# EAGLE board u2x (EAGLE 9.6.1)
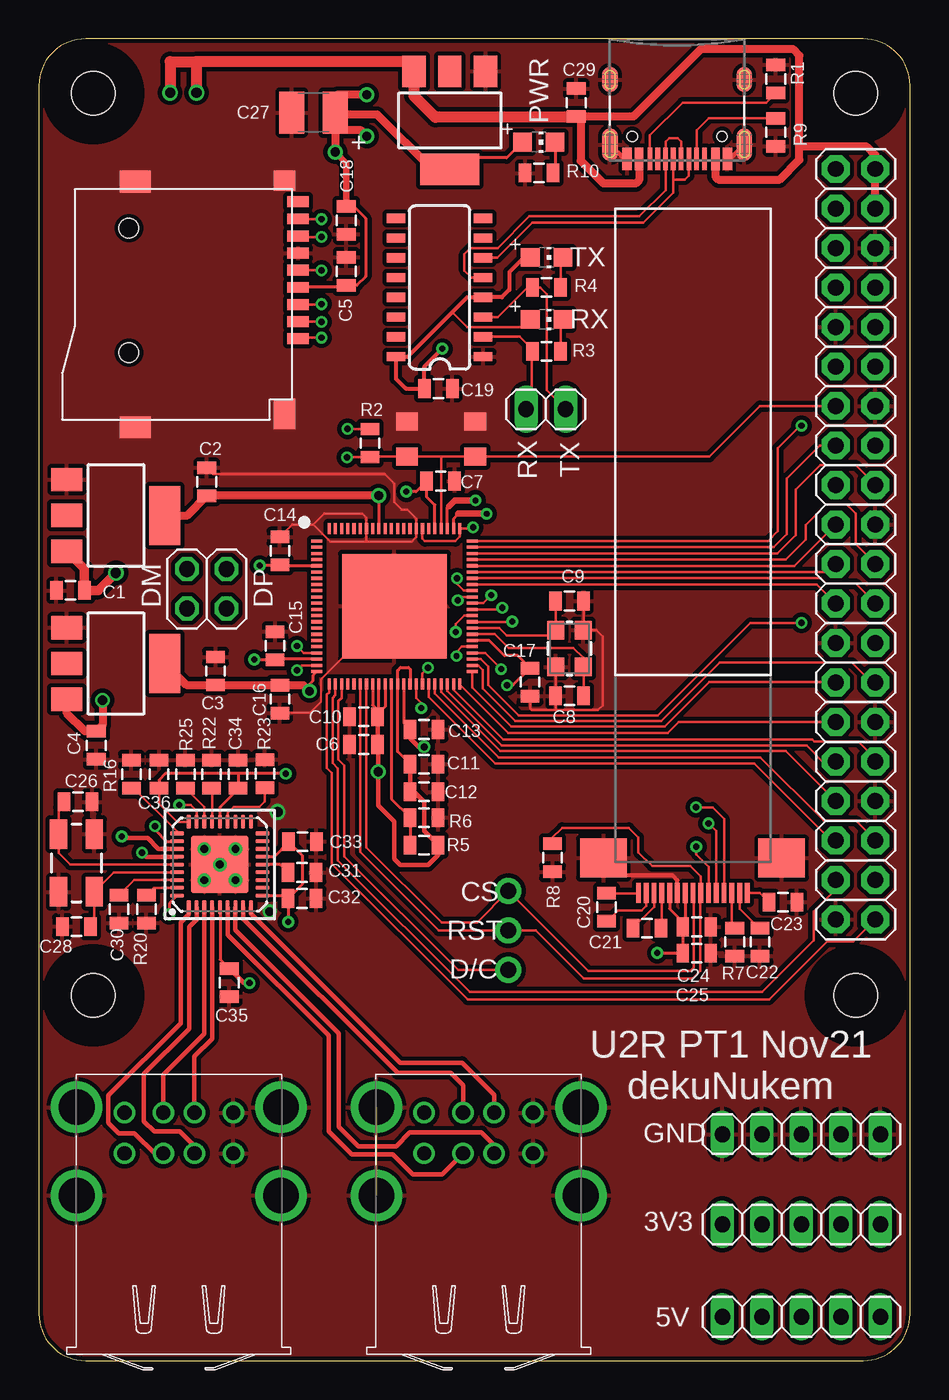
[diagram p0: board, top side]
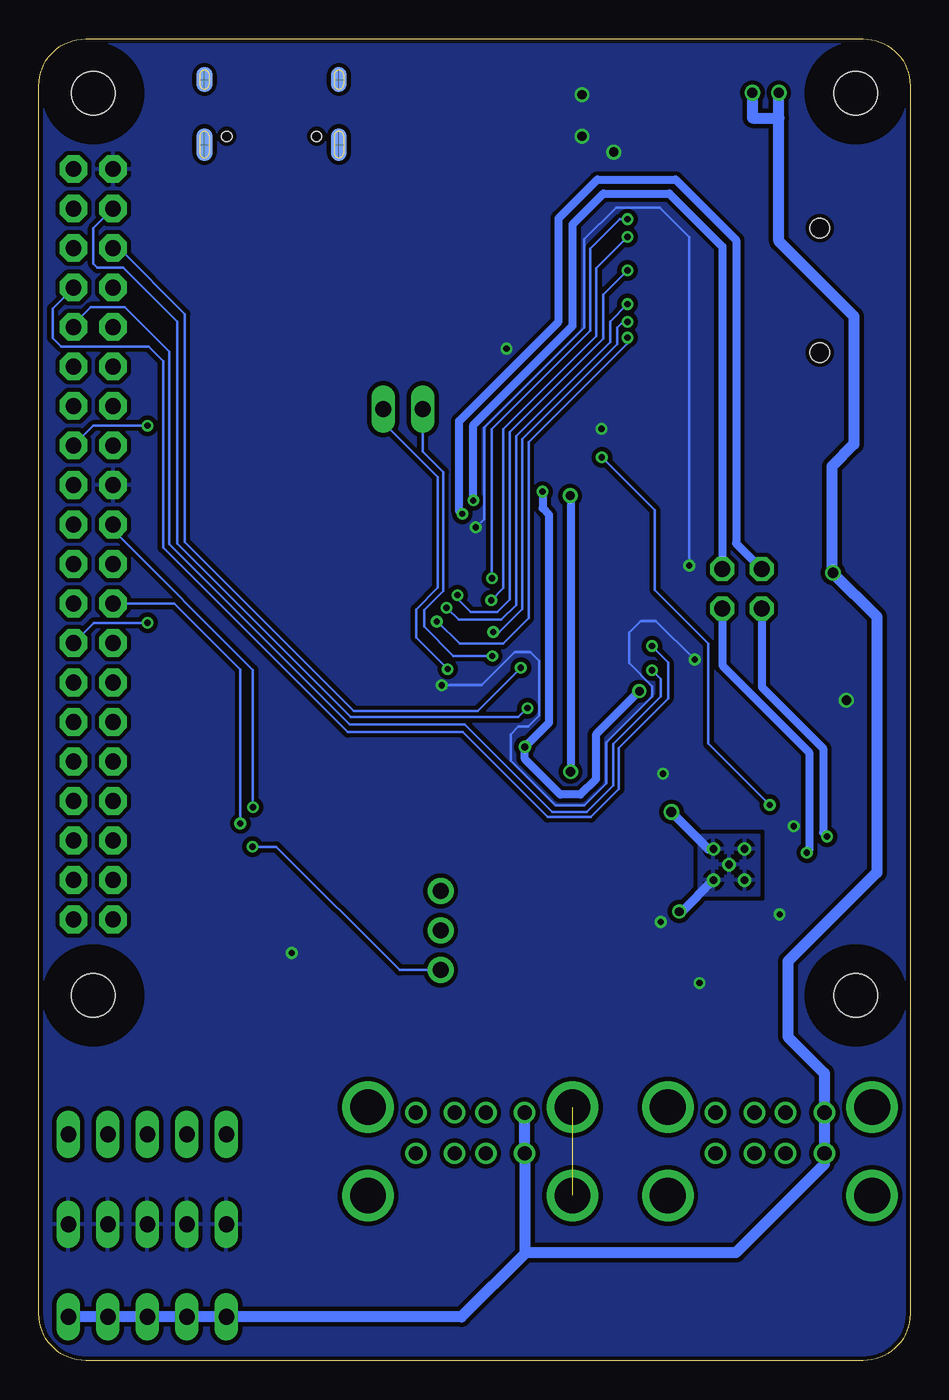
[diagram p1: board, bottom side, seen from below]

Size 56 x 85 mm. Coordinates in mm from the lower left corner, seen from the top.
Outline: 3,0 53,0 arc90 56,3 56,82 arc90 53,85 3,85 arc90 0,82 0,3 arc90 3,0
Copper layers (1*16): Top 0.035mm / dielectric 1.5mm / Bottom 0.035mm
Design rules "deku_2layer_6mil": minimum track width 6mil, minimum drill 15mil, track to track 6mil, track to pad 6mil, pad to pad 6mil, via to via 6mil, smd to smd 6mil, copper to edge 10mil, drill to drill 6mil, minimum pad ring 7mil, minimum via ring 7mil, stop-mask expansion 4mil, vias tented up to drill 25mil, thermal gap 10mil
Net classes: 1 power: width 0.178 mm

## Footprints (pad centres in the part's own frame; a part is rotated, then mirrored left to right if it is on the bottom)
0805 = smd 0.8 x 1.2: 1 -0.9,0; 2 0.9,0
C1210 = smd 1.6 x 2.7: 1 -1.4,0; 2 1.4,0
SOT223 = smd 1.5 x 2: 1 -2.3,-3.15; 2 0,-3.15; 3 2.3,-3.15 | smd 3.8 x 2: 4 0,3.15
USB-C-16P = smd 0.3 x 1.45: A5 -1.25,0; A6 -0.25,0; A7 0.25,0; A8 1.25,0; B5 1.75,0; B6 0.75,0; B7 -0.75,0; B8 -1.75,0 | smd 0.6 x 1.45: GND -3.225,0; GND2 3.225,0 | smd 1 x 2.1: SHLD1 -4.32,-0.915; SHLD2 4.32,-0.915 | smd 1 x 2.1 bottom: SHLD3 -4.32,-0.915; SHLD4 4.32,-0.915 | smd 1 x 1.6: SHLD5 -4.32,-5.095; SHLD8 4.32,-5.095 | smd 1 x 1.6 bottom: SHLD6 -4.32,-5.095; SHLD7 4.32,-5.095 | smd 0.55 x 1.45: VBUS1 -2.45,0; VBUS2 2.45,0 | hole 0.65: -2.89,-1.445; 2.89,-1.445
2X20-BIG = drill 1.016 pad 1.778 octagon: 1 -24.13,-1.27; 2 -24.13,1.27; 3 -21.59,-1.27; 4 -21.59,1.27; 5 -19.05,-1.27; 6 -19.05,1.27; 7 -16.51,-1.27; 8 -16.51,1.27; 9 -13.97,-1.27; 10 -13.97,1.27; 11 -11.43,-1.27; 12 -11.43,1.27; 13 -8.89,-1.27; 14 -8.89,1.27; 15 -6.35,-1.27; 16 -6.35,1.27; 17 -3.81,-1.27; 18 -3.81,1.27; 19 -1.27,-1.27; 20 -1.27,1.27; 21 1.27,-1.27; 22 1.27,1.27; 23 3.81,-1.27; 24 3.81,1.27; 25 6.35,-1.27; 26 6.35,1.27; 27 8.89,-1.27; 28 8.89,1.27; 29 11.43,-1.27; 30 11.43,1.27; 31 13.97,-1.27; 32 13.97,1.27; 33 16.51,-1.27; 34 16.51,1.27; 35 19.05,-1.27; 36 19.05,1.27; 37 21.59,-1.27; 38 21.59,1.27; 39 24.13,-1.27; 40 24.13,1.27
1X03-CLEANBIG = drill 1.016 pad 1.676: 1 -2.54,0; 2 0,0; 3 2.54,0
1X02 = drill 1.016 long: 1 -1.27,0; 2 1.27,0
2X02 = drill 1.016 octagon: 1 -1.27,-1.27; 2 -1.27,1.27; 3 1.27,-1.27; 4 1.27,1.27
1X05 = drill 1.016 long: 1 -5.08,0; 2 -2.54,0; 3 0,0; 4 2.54,0; 5 5.08,0
CHIP-LED0805 = smd 1.2 x 1.2: A 0,-1.05; C 0,1.05
TF-PULL = smd 0.7 x 1.4: 1 -2.2,-7.62; 2 -1.1,-7.62; 3 0,-7.62; 4 1.1,-7.62; 5 2.2,-7.62; 6 3.3,-7.62; 7 4.4,-7.62; 8 5.5,-7.62; 9 6.6,-7.62 | smd 1.4 x 2: S1 -7.9,2.85; S2 7.9,2.85 | smd 1.28 x 1.4: S3 7.96,-6.75 | smd 1.95 x 1.4: S4 -7.025,-6.75 | hole 1.25: -3.1,3.25; 4.9,3.25
342_SWICH_FOOT = smd 1.4 x 1.15: P$1 -2.2,-1.125; P$2 -2.2,1.125; P$3 2.2,1.125; P$4 2.2,-1.125
QFN-36 = smd 0.9 x 0.28: 1 -2.75,2; 2 -2.75,1.5; 3 -2.75,1; 4 -2.75,0.5; 5 -2.75,0; 6 -2.75,-0.5; 7 -2.75,-1; 8 -2.75,-1.5; 9 -2.75,-2; 19 2.75,-2; 20 2.75,-1.5; 21 2.75,-1; 22 2.75,-0.5; 23 2.75,0; 24 2.75,0.5; 25 2.75,1; 26 2.75,1.5; 27 2.75,2 | smd 0.28 x 0.9: 10 -2,-2.75; 11 -1.5,-2.75; 12 -1,-2.75; 13 -0.5,-2.75; 14 0,-2.75; 15 0.5,-2.75; 16 1,-2.75; 17 1.5,-2.75; 18 2,-2.75; 28 2,2.75; 29 1.5,2.75; 30 1,2.75; 31 0.5,2.75; 32 0,2.75; 33 -0.5,2.75; 34 -1,2.75; 35 -1.5,2.75; 36 -2,2.75 | drill 0.5: P$34 1,1; P$35 -1,1; P$36 -1,-1; P$37 1,-1; P$38 0,0 | smd 3.7 x 3.7: PAD 0,0
LUL_UG-2864HSWEG01_1.3_WRAPAROUND = smd 0.31 x 1.28: 1 3.5,0; 2 3,0; 3 2.5,0; 4 2,0; 5 1.5,0; 6 1,0; 7 0.5,0; 8 0,0; 9 -0.5,0; 10 -1,0; 11 -1.5,0; 12 -2,0; 13 -2.5,0; 14 -3,0; 15 -3.5,0 | smd 3 x 2.5: 16 5.75,-2.24; 17 -5.7,-2.24
SO016 = smd 0.6 x 1.2: 1 -4.445,-2.8; 2 -3.175,-2.8; 3 -1.905,-2.8; 4 -0.635,-2.8; 5 0.635,-2.8; 6 1.905,-2.8; 7 3.175,-2.8; 8 4.445,-2.8; 9 4.445,2.8; 10 3.175,2.8; 11 1.905,2.8; 12 0.635,2.8; 13 -0.635,2.8; 14 -1.905,2.8; 15 -3.175,2.8; 16 -4.445,2.8
MQFN88 = smd 0.7 x 0.2: P$1 -5,4.2; P$2 -5,3.8; P$3 -5,3.4; P$4 -5,3; P$5 -5,2.6; P$6 -5,2.2; P$7 -5,1.8; P$8 -5,1.4; P$9 -5,1; P$10 -5,0.6; P$11 -5,0.2; P$12 -5,-0.2; P$13 -5,-0.6; P$14 -5,-1; P$15 -5,-1.4; P$16 -5,-1.8; P$17 -5,-2.2; P$18 -5,-2.6; P$19 -5,-3; P$20 -5,-3.4; P$21 -5,-3.8; P$22 -5,-4.2; P$45 5,-4.2; P$46 5,-3.8; P$47 5,-3.4; P$48 5,-3; P$49 5,-2.6; P$50 5,-2.2; P$51 5,-1.8; P$52 5,-1.4; P$53 5,-1; P$54 5,-0.6; P$55 5,-0.2; P$56 5,0.2; P$57 5,0.6; P$58 5,1; P$59 5,1.4; P$60 5,1.8; P$61 5,2.2; P$62 5,2.6; P$63 5,3; P$64 5,3.4; P$65 5,3.8; P$66 5,4.2 | smd 0.2 x 0.7: P$23 -4.2,-5; P$24 -3.8,-5; P$25 -3.4,-5; P$26 -3,-5; P$27 -2.6,-5; P$28 -2.2,-5; P$29 -1.8,-5; P$30 -1.4,-5; P$31 -1,-5; P$32 -0.6,-5; P$33 -0.2,-5; P$34 0.2,-5; P$35 0.6,-5; P$36 1,-5; P$37 1.4,-5; P$38 1.8,-5; P$39 2.2,-5; P$40 2.6,-5; P$41 3,-5; P$42 3.4,-5; P$43 3.8,-5; P$44 4.2,-5; P$67 4.2,5; P$68 3.8,5; P$69 3.4,5; P$70 3,5; P$71 2.6,5; P$72 2.2,5; P$73 1.8,5; P$74 1.4,5; P$75 1,5; P$76 0.6,5; P$77 0.2,5; P$78 -0.2,5; P$79 -0.6,5; P$80 -1,5; P$81 -1.4,5; P$82 -1.8,5; P$83 -2.2,5; P$84 -2.6,5; P$85 -3,5; P$86 -3.4,5; P$87 -3.8,5; P$88 -4.2,5 | smd 6.74 x 6.74: P$89 0,0
M2.5HOLE = hole 2.8: 0,0
CRYSTAL-SMD-5X3 = smd 1.9 x 1.1: 1 -1.85,-1.15; 2 1.85,-1.15; 3 1.85,1.15; 4 -1.85,1.15
USB2 = drill 0.92 pad 1.27: 1-1 2.71,3.5; 1-2 2.71,1; 1-3 2.71,-1; 1-4 2.71,-3.5; 2-1 5.33,3.5; 2-2 5.33,1; 2-3 5.33,-1; 2-4 5.33,-3.5 | drill 2.3 pad 3: M1 0,6.57; M2 0,-6.57; M3 5.68,6.57; M4 5.68,-6.57
CRYSTAL-SMD-3.2X2.5MM = smd 1.2 x 1.1: 1 -1.175,-0.875; 2 1.175,-0.875; 3 1.175,0.875; 4 -1.175,0.875

## Placement (x,y rotation side)
C1  10uF  [0805]  2.03,49.53 0 top
C2  10uF  [0805]  10.79,56.52 270 top
C3  10uF  [0805]  11.35,44.35 270 top
C4  10uF  [0805]  3.68,39.56 90 top
C5  100nF  [0805]  19.76,70.05 270 top
C6  1uF  [0805]  20.88,39.62 0 top
C7  100nF  [0805]  25.83,56.57 180 top
C8  20pF  [0805]  34.11,42.75 180 top
C9  20pF  [0805]  34.11,48.84 0 top
C10  100nF  [0805]  20.88,41.4 0 top
C11  100nF  [0805]  24.77,38.35 180 top
C12  1uF  [0805]  24.77,36.58 180 top
C13  100nF  [0805]  24.77,40.59 180 top
C14  100nF  [0805]  15.49,52.07 270 top
C15  100nF  [0805]  15.19,45.97 270 top
C16  100nF  [0805]  15.49,42.55 90 top
C17  100nF  [0805]  31.57,43.64 90 top
C18  1uF  [0805]  19.76,73.33 90 top
C19  100nF  [0805]  25.68,62.51 180 top
C20  1uF  [0805]  36.5,29.16 90 top
C21  1uF  [0805]  39.09,27.81 180 top
C22  2.2uF  [0805]  46.35,26.92 90 top
C23  2.2uF  [0805]  47.83,29.49 180 top
C24  100nF  [0805]  42.29,27.89 180 top
C25  1uF  [0805]  42.29,26.21 180 top
C26  18pF  [0805]  2.51,35.94 0 top
C27  47uF  [C1210]  17.65,80.26 180 top
C28  18pF  [0805]  2.41,27.91 180 top
C29  10uF  [0805]  34.54,80.9 270 top
C30  100nF  [0805]  5.16,29.03 270 top
C31  100nF  [0805]  16.92,31.39 0 top
C32  100nF  [0805]  16.92,29.72 0 top
C33  100nF  [0805]  16.94,33.38 0 top
C34  100nF  [0805]  12.8,37.72 90 top
C35  100nF  [0805]  12.24,24.31 90 top
C36  100nF  [0805]  7.72,37.72 90 top
IC1  LD117AS33TR  [SOT223]  26.42,79.76 180 top
IC2  LD117AS25TR  [SOT223]  4.95,54.36 270 top
IC3  LD117AS12TR  [SOT223]  4.95,44.83 270 top
J2  [USB-C-16P]  41.03,77.29 180 top
JP1  [2X20-BIG]  52.5,52.5 270 top
JP2  [1X03-CLEANBIG]  30.18,27.66 90 top
JP3  [1X02]  32.59,61.19 180 top
JP4  [2X02]  10.79,49.63 180 top
JP5  [1X05]  49.02,14.55 0 top
JP6  [1X05]  49.02,8.76 0 top
JP7  [1X05]  49.02,2.82 0 top
LED1  [CHIP-LED0805]  32.64,70.94 270 top
LED2  [CHIP-LED0805]  32.13,78.36 270 top
LED3  [CHIP-LED0805]  32.64,66.95 270 top
R1  5.1K  [0805]  47.37,82.42 90 top
R2  12K  [0805]  21.29,59 270 top
R3  2K  [0805]  32.64,64.9 0 top
R4  2K  [0805]  32.64,69.01 0 top
R5  2K  [0805]  24.77,33.15 180 top
R6  2K  [0805]  24.77,34.92 0 top
R7  390K  [0805]  44.73,26.92 90 top
R8  12K  [0805]  33.02,32.33 270 top
R9  5.1K  [0805]  47.37,78.99 270 top
R10  2K  [0805]  32.16,76.38 0 top
R16  12K  [0805]  5.94,37.72 90 top
R20  12K  [0805]  6.91,29.03 90 top
R22  12K  [0805]  11.1,37.72 90 top
R23  12K  [0805]  14.53,37.74 90 top
R25  12K  [0805]  9.42,37.72 90 top
SD1  TF-HOLDER  [TF-PULL]  9.04,67.92 90 top
SW20  324_SW  [342_SWICH_FOOT]  25.86,59.26 180 top
U1  USB251XB  [QFN-36]  11.63,31.9 90 top
U2  [LUL_UG-2864HSWEG01_1.3_WRAPAROUND]  42.05,30.08 180 top
U5  CH340C  [SO016]  25.76,69.01 90 top
U$1  F1C100S_DEV  [MQFN88]  22.86,48.51 0 top
U$2  M2.5HOLE  [M2.5HOLE]  3.5,23.5 0 top
U$3  M2.5HOLE  [M2.5HOLE]  52.5,23.5 0 top
U$4  M2.5HOLE  [M2.5HOLE]  3.5,81.5 0 top
U$5  M2.5HOLE  [M2.5HOLE]  52.5,81.5 0 top
U$16  CRYSTAL-GROUNDED  [CRYSTAL-SMD-5X3]  2.41,32 90 top
X1  USB2  [USB2]  9,10.62 90 top
X8  USB2  [USB2]  28.27,10.62 90 top
Y1  24MHz  [CRYSTAL-SMD-3.2X2.5MM]  34.11,45.8 90 top

## Library data of the parts
C1-C25 C27 C29 C35 SD1 = clock
C26 C28 C30-C34 C36 R1 R8 R9 R16 R20 R22 R23 R25 = joyAnalog
IC1-IC3 = v-reg
J2 = SparkFun-Connectors; PROD_ID: CONN-14122
JP1 JP2 = adafruit_changed
JP3-JP7 = pinhead
LED1-LED3 = adafruit
R2-R7 R10 = SparkFun-Passives
SW20 = 3pos_slide_switch_centered
U1 = Microchip
U2 = lul
U5 = SparkFun-IC-Comms; PROD_ID: IC-14038
U$1-U$5 = f1c100s
U$16 = SparkFun-FreqCtrl
X1 X8 = RPB; OC_FARNELL: unknown; OC_NEWARK: unknown
Y1 = SparkFun-Clocks; PROD_ID: XTAL-12454

## Nets
+1V2: C3.2 C7.2 C13.2 C16.2 IC3.4 U$1.P$22 U$1.P$35 U$1.P$71
+2V5: C2.2 C6.2 C10.2 C11.2 C12.2 IC2.4 R5.1 U$1.P$30 U$1.P$31 U$1.P$32 U$1.P$34 U$1.P$36 U$1.P$80
+3V3: C4.2 C5.2 C14.2 C15.2 C17.2 C18.2 C19.2 C24.2 C25.2 C27.1 C32.1 C33.1 C34.1 C35.2 C36.1 IC1.4 IC3.3 JP1.1 JP1.17 JP6.1 JP6.2 JP6.3 JP6.4 JP6.5 LED1.A LED2.A LED3.A R2.1 SD1.4 U1.5 U1.10 U1.15 U1.23 U1.27 U1.29 U1.36 U2.5 U2.7 U5.4 U5.16 U$1.P$5 U$1.P$20 U$1.P$50 U$1.P$67 U$1.P$73
+5V: C1.2 C29.2 IC1.3 IC2.3 J2.VBUS1 J2.VBUS2 JP1.2 JP1.4 JP7.1 JP7.2 JP7.3 JP7.4 JP7.5 X1.1-1 X1.2-1 X8.1-1 X8.2-1
GND: C1.1 C2.1 C3.1 C4.1 C5.1 C6.1 C7.1 C8.2 C9.2 C10.1 C11.1 C12.1 C13.1 C14.1 C15.1 C16.1 C17.1 C18.1 C19.1 C22.1 C23.1 C24.1 C25.1 C26.2 C27.2 C28.2 C29.1 C30.2 C31.2 C32.2 C33.2 C34.2 C35.1 C36.2 IC1.1 IC2.1 IC3.1 J2.GND J2.GND2 J2.SHLD1 J2.SHLD2 J2.SHLD3 J2.SHLD4 J2.SHLD5 J2.SHLD6 J2.SHLD7 J2.SHLD8 JP1.6 JP1.9 JP1.14 JP1.20 JP1.25 JP1.30 JP1.34 JP1.39 JP5.1 JP5.2 JP5.3 JP5.4 JP5.5 R1.2 R6.2 R7.1 R8.2 R9.2 R10.1 R16.2 R20.1 R22.2 R23.2 R25.2 SD1.6 SD1.S1 SD1.S2 SD1.S3 SD1.S4 SW20.P$1 SW20.P$4 U1.P$34 U1.P$35 U1.P$36 U1.P$37 U1.P$38 U1.PAD U2.6 U2.16 U2.17 U5.1 U$1.P$74 U$1.P$82 U$1.P$89 U$16.2 U$16.4 X1.1-4 X1.2-4 X1.M1 X1.M2 X1.M3 X1.M4 X8.1-4 X8.2-4 X8.M1 X8.M2 X8.M3 X8.M4 Y1.2 Y1.4
N$1: SD1.8 U$1.P$58
N$2: J2.A5 R9.1
N$3: C8.1 U$1.P$51 Y1.1
N$4: C9.1 U$1.P$52 Y1.3
N$5: LED1.C R4.2
N$6: LED3.C R3.2
N$7: J2.B5 R1.1
N$8: SD1.7 U$1.P$57
N$9: SD1.5 U$1.P$56
N$10: SD1.3 U$1.P$55
N$11: SD1.2 U$1.P$54
N$12: SD1.1 U$1.P$53
N$13: U1.2 X1.1-3
N$14: R5.2 R6.1 U$1.P$33
N$15: U1.1 X1.1-2
N$16: J2.A6 J2.B6 U5.5
N$17: JP1.13 R2.2 SW20.P$2 SW20.P$3 U1.26 U$1.P$70
N$18: J2.A7 J2.B7 U5.6
N$19: JP1.26 U$1.P$47
N$21: JP1.27 U$1.P$45
N$22: JP1.18 U$1.P$64
N$23: JP1.22 U$1.P$63
N$24: JP1.15 U$1.P$65
N$25: JP1.16 U$1.P$66
N$26: JP1.29 U$1.P$44
N$27: JP1.32 U$1.P$43
N$28: JP1.31 U$1.P$42
N$29: JP1.33 U$1.P$41
N$30: JP1.36 U$1.P$40
N$31: JP1.35 U$1.P$39
N$32: JP1.38
N$33: JP1.40 U$1.P$23
N$34: JP1.37 U$1.P$24
N$35: C20.2 U2.1
N$36: C20.1 U2.2
N$37: C21.2 U2.3
N$38: C21.1 U2.4
N$39: R7.2 U2.13
N$40: C22.2 U2.14
N$41: C23.2 U2.15
N$42: JP2.3 U2.8 U$1.P$29
N$43: JP2.2 R8.1 U2.9 U$1.P$28
N$44: JP2.1 U2.10 U$1.P$25
N$45: U1.4 X1.2-3
N$46: U1.3 X1.2-2
N$47: U1.6 X8.1-2
N$48: U1.7 X8.1-3
N$49: U1.8 X8.2-2
N$50: U1.9 X8.2-3
N$51: JP4.4 U1.30
N$52: JP4.2 U1.31
N$53: LED2.C R10.2
N$78: R20.2 U1.35
N$81: C28.1 U1.33 U$16.1
N$82: C26.1 U1.32 U$16.3
N$89: C31.1 U1.14
N$90: C30.1 U1.34
N$92: R16.1 U1.28
N$93: R25.1 U1.25
N$94: R23.1 U1.22
N$96: R22.1 U1.24
SLAVE_REQ: JP1.28 U$1.P$46
SPI0_CLK: JP1.23 U2.11 U$1.P$59
SPI0_CS: JP1.24 U$1.P$60
SPI0_MISO: JP1.21 U$1.P$61
SPI0_MOSI: JP1.19 U2.12 U$1.P$62
TWI0_SCL: JP1.5 U$1.P$38
TWI0_SDA: JP1.3 U$1.P$37
UART0_RX: JP3.2 R3.1 U5.2 U$1.P$49
UART0_TX: JP3.1 R4.1 U5.3 U$1.P$48
UART2_RX: JP1.10 U$1.P$21
UART2_TX: JP1.8 U$1.P$19
USB_DM: JP4.3 U$1.P$68
USB_DP: JP4.1 U$1.P$69

## Tracks (layer width: path | path; a pad name or v marks a point on that pad's centre or on a via)
+1V2  (via drill 0.4, 0.45, 0.55)
  Top 0.203: U$1.P$71 25.46,55.02 24.93,55.55 C7.2 24.25,55.88 v23.62,55.88 | U$1.P$35 23.46,40.99 C13.2 | U$1.P$22 17.61,44.06 17.61,43.72 17.4,43.51 v17.4,43.05
  Top 0.305: C13.2 23.86,40.02 24.41,39.47 v24.77,39.47
  Top 0.508: v17.4,43.05 17.01,43.45 C16.2 C3.2 9.49,43.45 IC3.4
  Bottom 0.508: v17.4,43.05 20.19,40.26 20.19,37.39 21.18,36.4 22.48,36.4 24.77,38.68 v24.77,39.47 23.22,41.02 23.22,54.41 23.62,54.81 v23.62,55.88
+2V5  (via drill 0.6)
  Top 0.203: v21.84,55.63 21.86,55.61 U$1.P$80 | C10.2 21.78,41.58 21.86,41.66 | 21.86,41.66 21.86,41.76 | 21.86,41.76 U$1.P$31 | U$1.P$30 21.46,42.15 21.86,41.76 | U$1.P$32 22.26,42.06 21.86,41.66 | C11.2 23.06,39.16 U$1.P$34 23.06,44.4 23.24,44.58 23.75,44.58 23.88,44.45 23.88,43.53 U$1.P$36
  Top 0.305: C10.2 C6.2 21.82,39.58 v21.82,37.87 21.82,35.71 22.86,34.67 22.86,32.26 23.24,31.88 25.02,31.88 25.66,32.52 R5.1 24.77,34.05 24.77,35.94 24.13,36.58 C12.2 C11.2
  Top 0.508: IC2.4 9.54,54.36 C2.2 10.81,55.63 v21.84,55.63
  Bottom 0.508: v21.84,55.63 21.82,55.6 v21.82,37.87
+3V3  (via drill 0.4, 0.6)
  Top 0.152: v27.91,53.59 27.84,53.51 U$1.P$67 27.06,52.99 26.77,52.7 24.82,52.7 24.66,52.86 U$1.P$73 | LED3.A 31.11,66.47 27.53,66.47 26.58,67.42 | v19.84,59.92 21.27,59.92 R2.1 | C36.1 7.72,35.81 8.88,34.65 U1.27
  Top 0.203: v14.2,51.13 15.45,51.13 C14.2 15.55,51.11 U$1.P$5 | U$1.P$20 15.23,45.11 C15.2 15.18,45.09 v13.84,45.09 | v30.1,43.43 30.47,43.43 C17.2 30.77,45.34 29.92,45.34 28.95,46.31 U$1.P$50 | U2.5 40.55,29.05 41.39,28.2 C24.2 | U2.7 41.55,28.05 C24.2 | C24.2 C25.2 v39.75,26.21 | v7.47,34.37 7.47,34.14 8.2,33.4 U1.29 | C32.1 16.92,30.62 16.92,32.5 C33.1 16.04,33.31 15.13,32.4 U1.15 | U1.10 15.83,29.9 C32.1 | U1.36 8.38,29.4 v8.38,28.7 | C36.1 7.72,37.34 8.13,37.74 12.8,37.74 | v15.88,37.74 12.8,37.74 | 12.8,37.74 12.83,37.72 12.83,36.84 C34.1 12.8,36.75 11.63,35.59 U1.23 | C32.1 16.03,29.71 v16.03,28.22 | SD1.4 19.63,69.02 C5.2 20.45,69.15 21.01,69.71 21.01,73.47 20.24,74.23 C18.2 19.76,74.5 | LED2.A 30.07,77.34 27.15,77.34 IC1.4 | U1.5 11.66,29.13 11.66,25.79 C35.2
  Top 0.254: LED1.A 31.18,70.94 30.24,70 30.24,68.86 29.76,68.38 U5.4 27.53,68.38 26.58,67.42 23.72,64.57 U5.16 22.96,63.15 23.6,62.51 C19.2 24.78,63.92 v25.93,65.08
  Top 0.279: v13.54,24.28 13.17,24.28 C35.2
  Top 0.406: v19.05,77.72 19.76,77.01 19.76,74.5
  Top 0.508: IC1.4 25.27,76.61 21.74,80.14 19.18,80.14 | 19.18,80.14 C27.1 | v21.08,81.41 19.18,81.41 19.18,80.14 | C27.1 v19.05,77.72 | v21.08,78.74 20.7,79.12 19.05,79.12 C27.1 | v4.09,42.47 4.09,40.87 C4.2 2.97,40.46 1.8,41.63 IC3.3
  Bottom 0.152: v27.91,53.59 27.38,54.13 27.38,59.99 20.93,66.45 20.93,72.11 18.9,74.14 16.08,74.14 14.2,72.26 v14.2,51.13 | v13.84,45.09 16.33,47.57 17.32,47.57 18.06,46.84 18.06,44.86 16.56,43.36 16.56,42.72 19.53,39.75 19.53,37.11 20.95,35.69 22.76,35.69 25.68,38.61 25.68,40.26 25.17,40.77 24.54,40.77 23.82,41.48 23.82,44.98 24.41,45.57 25.4,45.57 27.53,43.43 v30.1,43.43
  pour Bottom (isolate 0.279, rank 2): 56,82 56,3 arc-90 53,0 3,0 arc-90 0,3 0,82 arc-90 3,85 53,85 arc-90
+5V  (via drill 0.65)
  Top 0.508: J2.VBUS2 38.58,75.92 38.35,75.69 36.3,75.69 34.82,77.17 34.82,79.72 C29.2 38.22,80 42.55,84.33 48.51,84.33 48.9,83.95 48.9,78.05 | J2.VBUS1 43.48,76.15 43.69,75.95 47.62,75.95 48.9,77.22 48.9,78.05 | JP1.4 JP1.2 53.77,77.52 53.24,78.05 48.9,78.05
  Top 0.61: IC2.3 2.93,50.93 C1.2 3.82,49.53 v4.95,50.66
  Top 0.711: C29.2 34.54,79.95 25.49,79.95 24.12,81.32 IC1.3 23.48,83.54 10.13,83.54 | 10.13,83.54 8.43,83.54 v8.43,81.53 | v10.13,81.53 10.13,83.54
  Bottom 0.711: X8.2-1 X8.1-1 24.77,6.88 | 24.77,6.88 28.83,2.82 JP7.1 JP7.2 JP7.3 JP7.4 JP7.5 | 24.77,6.88 24.69,6.96 11.18,6.96 5.5,12.64 X1.1-1 X1.2-1 5.5,18.48 7.85,20.83 7.85,25.68 2.13,31.39 2.13,47.84 v4.95,50.66 5.03,50.74 5.03,57.51 3.61,58.93 3.61,67.16 8.43,71.98 8.43,79.91 | 8.43,79.91 v8.43,81.53 | 8.43,79.91 10.11,79.91 10.11,81.53 v10.13,81.53
GND  (via drill 0.55, 0.65)  (1 unrouted)
  Top 0.127: 17.63,53.77 18.72,52.68 | U$1.P$89 18.14,43.79 18.14,42.37 17.41,41.65 C16.1
  Top 0.152: C9.2 35.01,47 Y1.2 35.83,46.97 36.25,46.56 36.25,42.14 35.94,41.83 33.15,41.83 | C14.1 16.3,53.77 17.63,53.77 18.34,54.48 20.78,54.48 21.06,54.21 U$1.P$82 21.06,52.68 | 18.72,52.68 21.06,52.68 | 21.06,52.68 23.98,52.68 24.26,52.96 U$1.P$74 24.26,54.15 23.67,54.74 23.32,54.74 22.84,55.22 22.84,56.39 22.23,57 11.21,57 C2.1 | C17.1 31.57,41.96 31.7,41.83 33.15,41.83 | 33.15,41.83 33.21,41.9 C8.2 33.24,42.77 Y1.4
  Top 0.254: U2.6 41.05,30.89 40.74,31.19 37.42,31.19 U2.16
  Top 0.305: J2.SHLD2 37.63,77.29 J2.GND2 | J2.GND 44.44,77.29 J2.SHLD3
  Bottom 0.61: v15.34,35.28 12.96,32.9 U1.P$37 | v14.83,28.88 14.66,28.88 U1.P$36
  pour Top (isolate 0.279): 3,0 53,0 arc90 56,3 56,82 arc90 53,85 3,85 arc90 0,82 0,3 arc90
  pour Bottom (isolate 0.406): 9.7,33.78 13.59,33.78 13.59,29.95 9.7,29.95
N$1  (via drill 0.4)
  Top 0.152: U$1.P$58 27.32,49.51 26.87,49.96 v26.87,50.32 | v18.16,73.41 18.15,73.42 SD1.8
  Bottom 0.152: v18.16,73.41 18.64,73.41 20.55,71.5 20.55,66.24 26.87,59.92 v26.87,50.32
N$2
  Top 0.152: R9.1 43.06,79.89 42.28,79.11 J2.A5
N$3
  Top 0.152: U$1.P$51 29.31,46.71 30.2,45.82 34.37,45.82 34.99,45.2 Y1.1 35.01,44.6 C8.1
N$4
  Top 0.152: U$1.P$52 29.59,47.11 30.07,46.63 32.9,46.63 Y1.3 33.21,47 C9.1
N$5
  Top 0.152: R4.2 33.54,70.79 LED1.C
N$6
  Top 0.152: R3.2 33.54,66.8 LED3.C
N$7
  Top 0.152: R1.1 46.75,80.9 41.38,80.9 39.28,78.81 J2.B5
N$8  (via drill 0.4)
  Top 0.152: U$1.P$57 27.14,49.11 v26.92,48.9 | v18.16,72.26 16.72,72.26 SD1.7
  Bottom 0.152: v26.92,48.9 26.14,49.68 26.14,59.92 20.17,65.89 20.17,70.26 v18.16,72.26
N$9  (via drill 0.4)
  Top 0.152: U$1.P$56 28.57,48.71 v29.08,49.23 | v18.16,70.1 18.14,70.12 SD1.5
  Bottom 0.152: v29.08,49.23 29.08,48.97 28.25,48.13 26.54,48.13 25.73,48.95 25.73,59.72 19.71,65.73 19.71,68.56 v18.16,70.1
N$10  (via drill 0.4)
  Top 0.152: U$1.P$55 29.7,48.31 v29.79,48.41 | SD1.3 18.14,67.92 v18.16,67.94
  Bottom 0.152: v29.79,48.41 29.77,48.41 29.01,47.65 26.26,47.65 25.32,48.59 25.32,59.46 19.28,65.51 19.28,66.83 v18.16,67.94
N$11  (via drill 0.4)
  Top 0.152: U$1.P$54 27.35,47.91 26.8,47.36 v26.8,46.86 | v18.16,66.8 16.68,66.8 SD1.2
  Bottom 0.152: v26.8,46.86 26.42,46.86 24.94,48.34 24.94,59.26 18.82,65.38 18.82,66.42 18.44,66.8 v18.16,66.8
N$12  (via drill 0.4)
  Top 0.152: U$1.P$53 v30.42,47.51 v30.43,47.52 | v18.16,65.79 16.73,65.79 SD1.1
  Bottom 0.152: v30.43,47.52 30.38,47.52 28.96,46.1 26.16,46.1 24.51,47.75 24.51,59.05 18.16,65.41 v18.16,65.79
N$13
  Top 0.279: U1.2 10.13,28.37 9.65,27.89 9.65,21.34 6.76,18.44 6.76,15.39 7.42,14.73 9.07,14.73 10,13.8 X1.1-3
N$14
  Top 0.203: U$1.P$33 22.66,36.13 R6.1 R5.2
N$15
  Top 0.279: U1.1 9.63,28.71 9.12,28.19 9.12,21.69 4.47,17.04 4.47,15.29 5.13,14.63 6.14,14.63 7.44,13.33 X1.1-2
N$16
  Top 0.152: J2.A6 41.28,78.4 41.07,78.61 40.51,78.61 40.28,78.38 J2.B6 40.28,75.28 38.58,73.58 31.52,73.58 29.49,71.55 27.74,71.55 27.36,71.17 27.36,70.1 27.81,69.65 U5.5
N$17  (via drill 0.4)
  Top 0.152: 25.88,58.13 SW20.P$3 21.31,58.13 R2.2 19.83,58.1 v19.81,58.09 | 25.88,58.13 SW20.P$2 43.1,58.13 46.35,61.39 JP1.13 | U$1.P$70 25.86,58.11 25.88,58.13 | U1.26 10.13,35.36 9.75,35.74 v9.02,35.74
  Bottom 0.152: v19.81,58.09 16.41,54.69 16.41,49.55 12.95,46.1 12.95,39.67 v9.02,35.74
N$18
  Top 0.152: J2.B7 41.78,76.2 41.53,75.95 40.78,75.95 | 40.78,75.95 40.78,75.1 38.86,73.18 31.73,73.18 29.46,70.92 U5.6 | 40.78,75.95 J2.A7
N$19  (via drill 0.4)
  Top 0.152: U$1.P$47 28.42,45.11 28.88,44.65 28.88,43.43 30.84,41.48 39.78,41.48 45.74,47.45 v49.02,47.45
  Bottom 0.152: v49.02,47.45 52.47,47.45 JP1.26
N$21
  Top 0.152: U$1.P$45 27.86,43.28 30.38,40.77 40.23,40.77 43.1,43.64 51.2,43.64 JP1.27
N$22
  Top 0.152: U$1.P$64 47.47,51.91 48.64,53.09 48.64,56.01 50.22,57.58 52.5,57.58 JP1.18
N$23
  Top 0.152: U$1.P$63 48.01,51.51 49.3,52.81 49.3,53.75 50.6,55.04 51.94,55.04 52.5,54.48 52.5,52.5 JP1.22
N$24
  Top 0.152: U$1.P$65 47.23,52.31 48.08,53.16 48.08,56.72 50.21,58.85 JP1.15
N$25  (via drill 0.4)
  Top 0.152: U$1.P$66 46.87,52.71 47.5,53.34 47.5,58.67 48.95,60.12 v49.02,60.12
  Bottom 0.152: v49.02,60.12 52.5,60.12 JP1.16
N$26
  Top 0.152: U$1.P$44 27.06,43.48 30.18,40.36 40.41,40.36 41.12,41.07 JP1.29
N$27
  Top 0.152: U$1.P$43 26.66,43.14 29.84,39.95 49.71,39.95 49.86,39.8 52.68,39.8 53.77,38.71 JP1.32
N$28
  Top 0.152: U$1.P$42 26.26,43.06 29.77,39.55 49.35,39.55 50.37,38.53 JP1.31
N$29
  Top 0.152: U$1.P$41 25.86,43 29.67,39.19 48.03,39.19 JP1.33
N$30
  Top 0.152: U$1.P$40 25.46,42.89 29.57,38.79 46.38,38.79 50.44,34.72 52.5,34.72 JP1.36
N$31
  Top 0.152: U$1.P$39 25.06,42.68 29.34,38.41 45.97,38.41 50.93,33.45 JP1.35
N$33
  Top 0.152: U$1.P$23 18.66,42.98 18.51,42.83 18.51,38.11 18.82,37.8 18.82,31.95 27.56,23.22 46.94,23.22 50.67,26.95 52.35,26.95 JP1.40
N$34
  Top 0.152: U$1.P$24 19.06,42.8 18.88,42.62 18.88,38.42 19.23,38.08 19.23,32.18 27.69,23.72 46.51,23.72 49.81,27.03 49.81,28.88 51.23,30.3 JP1.37
N$35
  Top 0.152: U2.1 38.53,30.06 C20.2
N$36
  Top 0.152: C20.1 36.54,28.26 37.24,28.96 38.76,28.96 39.05,29.24 U2.2
N$37
  Top 0.152: C21.2 39.55,29.17 U2.3
N$38
  Top 0.152: U2.4 40.05,27.87 C21.1
N$39
  Top 0.152: U2.13 44.55,28.01 R7.2
N$40
  Top 0.152: U2.14 45.05,29.05 46.27,27.82 C22.2
N$41
  Top 0.152: U2.15 46.34,30.08 C23.2
N$42
  Top 0.152: U$1.P$29 21.06,33.02 25.88,28.19 28.17,28.19 JP2.3 35.31,25.07 41.88,25.07 42.1,25.28 42.1,30.03 U2.8
N$43
  Top 0.152: U$1.P$28 20.66,32.7 25.7,27.66 JP2.2 31.95,27.66 35.03,24.59 42.04,24.59 42.52,25.07 42.52,30.05 U2.9 42.55,31.14 41.88,31.8 39.42,31.8 38.53,32.69 38.53,33.66 37.92,34.27 33.63,34.27 32.94,33.58 32.94,33.31 R8.1
N$44  (via drill 0.4)
  Top 0.152: U$1.P$25 19.46,42.62 19.25,42.42 19.25,38.66 19.63,38.28 19.63,32.44 26.95,25.12 JP2.1 | v42.27,33.05 42.27,32.54 43.05,31.76 U2.10
  Bottom 0.152: JP2.1 32.82,25.12 40.74,33.05 v42.27,33.05
N$45
  Top 0.279: U1.4 11.13,20.68 10,19.55 X1.2-3
N$46
  Top 0.279: U1.3 10.63,21.02 8,18.39 X1.2-2
N$47
  Top 0.279: U1.6 12.13,27.39 18.62,20.9 18.62,14.76 20.12,13.26 22.76,13.26 24.03,11.99 25.93,11.99 X8.1-2
N$48
  Top 0.279: U1.7 12.63,27.7 19.28,21.06 19.28,15.04 20.52,13.79 22.96,13.79 23.85,14.68 28.45,14.68 29.27,13.86 X8.1-3
N$49
  Top 0.279: U1.8 13.13,28.42 23.06,18.49 26.49,18.49 27.27,17.71 X8.2-2
N$50
  Top 0.279: U1.9 13.63,28.76 23.24,19.15 27.21,19.15 29.27,17.09 X8.2-3
N$51  (via drill 0.4)
  Top 0.279: U1.30 7.69,32.9 6.99,33.6
  Top 0.305: 6.99,33.6 5.44,33.6 v5.33,33.71
  Bottom 0.508: JP4.4 9.53,43.31 5.59,39.37 5.59,33.96 v5.33,33.71
N$52  (via drill 0.4)
  Top 0.279: v6.63,32.66 6.89,32.4 U1.31
  Bottom 0.508: JP4.2 12.06,44.7 6.48,39.12 6.48,32.82 v6.63,32.66
N$53
  Top 0.203: LED2.C 33.18,76.5 R10.2
N$78
  Top 0.152: U1.35 7.38,30.4 R20.2
N$81
  Top 0.152: U1.33 4.81,31.4 U$16.1 3.56,28.16 C28.1
N$82
  Top 0.152: U1.32 2.01,31.9 1.26,32.65 U$16.3 1.26,35.59 C26.1
N$89
  Top 0.203: C31.1 15.51,31.9 U1.14
N$90
  Top 0.152: U1.34 6.13,30.9 C30.1
N$92
  Top 0.152: U1.28 8.88,34.02 6.08,36.82 R16.1
N$93
  Top 0.152: R25.1 10.63,35.61 U1.25
N$94
  Top 0.152: R23.1 14.53,35.97 14.17,35.61 12.52,35.61 12.13,35.22 U1.22
N$96
  Top 0.152: R22.1 11.13,36.79 U1.24
SLAVE_REQ
  Top 0.152: JP1.28 53.54,43.61 52.27,44.88 43.76,44.88 40.01,41.12 30.63,41.12 28.52,43.23 28.52,44.42 28.23,44.71 U$1.P$46
SPI0_CLK  (via drill 0.4)
  Top 0.152: U$1.P$59 50.01,49.91 JP1.23 | v43.05,34.54 43.55,34.05 U2.11
  Bottom 0.152: JP1.23 47.29,48.69 43.05,44.45 v43.05,34.54
SPI0_CS
  Top 0.152: U$1.P$60 50.27,50.31 50.62,49.96 52.5,49.96 JP1.24
SPI0_MISO
  Top 0.152: U$1.P$61 50.71,50.71 JP1.21
SPI0_MOSI  (via drill 0.4)
  Top 0.152: U$1.P$62 48.57,51.11 JP1.19 | v42.24,35.59 43.31,35.59 44.05,34.85 U2.12
  Bottom 0.152: JP1.19 51.23,53.41 42.24,44.42 v42.24,35.59
TWI0_SCL  (via drill 0.4)
  Top 0.152: U$1.P$38 24.66,44.19 v25.02,44.55
  Bottom 0.152: JP1.5 50.85,71.55 46.61,67.31 46.61,52.63 35.76,41.78 27.79,41.78 v25.02,44.55
TWI0_SDA  (via drill 0.4)
  Top 0.152: U$1.P$37 24.26,42.62 24.59,42.3 v24.59,41.96
  Bottom 0.152: v24.59,41.96 25.17,41.38 35.94,41.38 47.12,52.55 47.12,66.83 50.57,70.28 52.25,70.28 52.5,70.54 52.5,72.82 JP1.3
UART0_RX  (via drill 0.38)
  Top 0.152: U$1.P$49 27.2,45.91 26.85,45.56 v26.85,45.31 | U5.2 30.91,65.84 31.74,65.01 R3.1 31.7,64.86 31.7,61.57 JP3.2
  Bottom 0.152: v26.85,45.31 29.36,45.31 31.24,47.19 31.24,48.26 30,49.51 30,57.15 31.32,58.47 JP3.2
UART0_TX  (via drill 0.38)
  Top 0.152: U$1.P$48 28.68,45.51 v29.72,44.48 | U5.3 29.49,67.11 31.39,69.01 R4.1 32.22,69.01 32.64,68.59 32.64,62.41 JP3.1
  Bottom 0.152: v29.72,44.48 31.75,46.51 31.75,48.31 30.35,49.71 30.35,56.82 33.86,60.33 JP3.1
UART2_RX  (via drill 0.4)
  Top 0.152: U$1.P$21 16.9,44.71 v16.59,44.4
  Bottom 0.152: v16.59,44.4 16.03,43.84 16.03,42.7 19.07,39.65 19.07,36.98 20.78,35.28 23.01,35.28 28.63,40.89 36.02,40.89 47.62,52.5 47.62,64.9 50.47,67.74 52.65,67.74 53.77,66.63 JP1.10
UART2_TX  (via drill 0.4)
  Top 0.152: U$1.P$19 17.02,45.51 v16.59,45.95
  Bottom 0.152: v16.59,45.95 15.54,44.91 15.54,42.57 18.72,39.4 18.72,36.75 20.52,34.95 23.29,34.95 28.75,40.41 36.14,40.41 48.01,52.27 48.01,64.26 48.95,65.2 54.56,65.2 55.12,65.76 55.12,67.66 JP1.8
USB_DM  (via drill 0.38)
  Top 0.203: U$1.P$68 26.66,54.14 26.98,54.46
  Top 0.406: 26.98,54.46 v28.78,54.46
  Bottom 0.508: v28.78,54.46 28.98,54.66 28.98,60.43 22.58,66.83 22.58,73.46 20.09,75.95 15.06,75.95 11.18,72.06 11.18,52.55 JP4.3
USB_DP  (via drill 0.38)
  Top 0.203: U$1.P$69 26.26,54.86 26.36,54.97
  Top 0.406: 26.36,54.97 26.72,55.32 v28.07,55.32
  Bottom 0.508: v28.07,55.32 28.07,60.17 21.69,66.55 21.69,73.08 19.71,75.06 15.47,75.06 12.06,71.65 JP4.1

## Text on the board
tNames: PWR | TX | RX | RX | TX | DM | DP | CS | RST | D/C | U2R PT1 Nov21 / dekuNukem | GND | 3V3 | 5V